# Altium PCB amt203s_connector.PCBDOC
Units mm, origin at the board's own origin, x right, y up, seen from the top; angles counter-clockwise.
Board outline 14.99 x 14.99 mm, 2 copper layers (TopLayer, BottomLayer); 4 components, 9 nets, 23 pads, 0 vias.
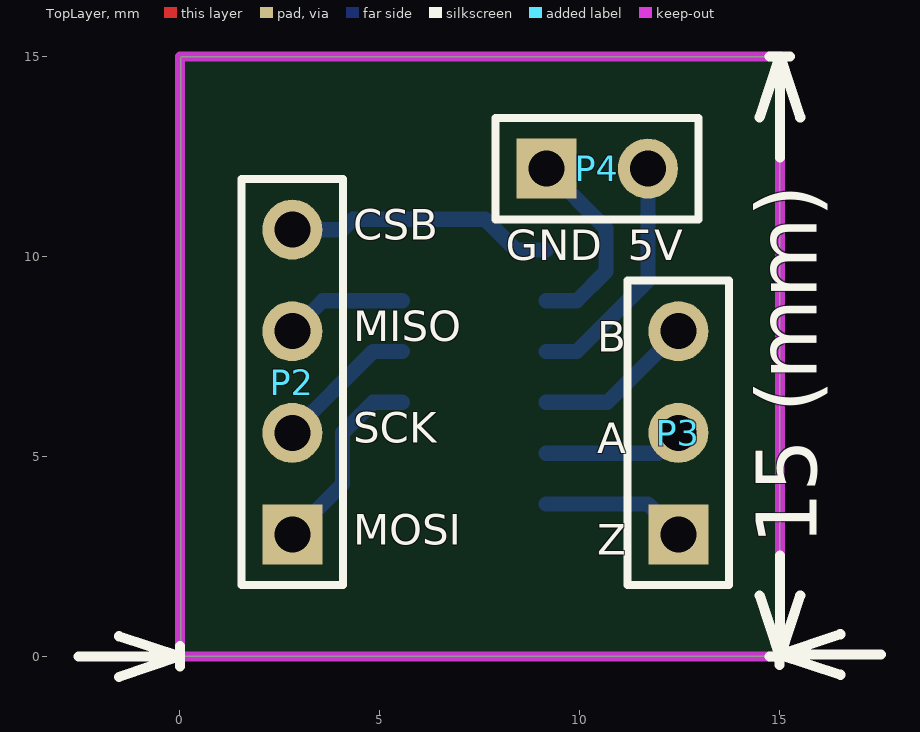
[diagram p0: TopLayer view]
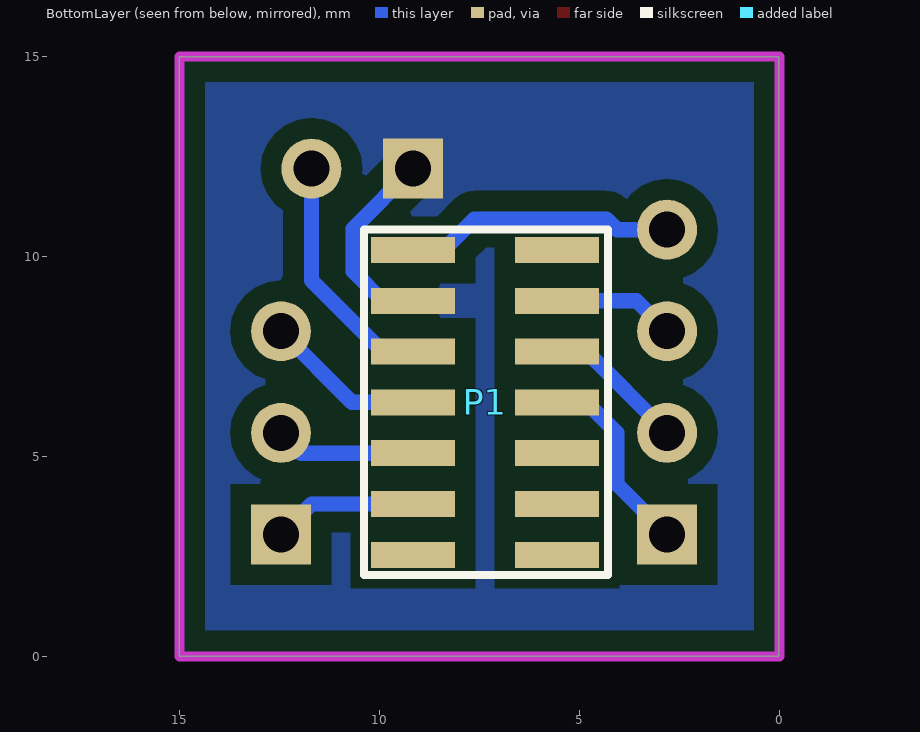
[diagram p1: BottomLayer view, seen from below]

## Layer stack, top to bottom
TopSolder: solder mask 0.0102, Solder Resist, Dk 3.5
TopLayer: signal copper 0.0356
Dielectric1: core 0.32, FR-4, Dk 4.8
BottomLayer: signal copper 0.0356
BottomSolder: solder mask 0.0102, Solder Resist, Dk 3.5

## Board outline
0.014,0 15,0 15,14.986 0.014,14.986

## Design rules (kind name [scope] priority, off if disabled: settings)
Clearance [All] p1: gap=0.508 ignorepadtopadclearanceinfootprint=FALSE except(0: Arc-Text Arc-Hole Track-Text Track-Hole SMDPad-Text SMDPad-Hole THPad-Text THPad-Hole Via-Text Via-Hole Fill-Text Fill-Hole Poly-Text Poly-Hole Region-Text Region-Hole Text-Text Text-Hole; 0.254: Arc-Arc Arc-Track Arc-SMDPad Arc-THPad Arc-Via Track-Track Track-SMDPad Track-THPad Track-Via SMDPad-SMDPad SMDPad-THPad SMDPad-Via THPad-THPad THPad-Via Via-Via)
ComponentClearance [All] p1: gap=0 collisioncheckmode=3 verticalgap=0.254 showdistances=FALSE
FabricationTestPointUsage TestPointUsage [All] p1: valid=0 allowmultiple=FALSE
FabricationTestpoint Testpoint [All] p1: side=3 testpointundercomponent=TRUE minsize=1.016 maxsize=2.54 preferedsize=1.524 minholesize=0.508 maxholesize=1.016 preferedholesize=0.813 testpointgrid=0.025 allowsidetop=TRUE allowsidebottom=TRUE usegrid=TRUE gridtolerance=0
PasteMaskExpansion PasteMaskExpansion_1 [InComponent('P1')] p1: expansion=-3.81
PasteMaskExpansion [All] p2: expansion=0
PlaneClearance [All] p1: clearance=0.254
PlaneConnect [All] p1: planeconnectstyle=Direct reliefexpansion=0.508 reliefentries=4 reliefconductorwidth=0.254 reliefairgap=0.254
PolygonConnect [All] p1: connectstyle=Direct reliefconductorwidth=0.254 reliefentries=4 polygonreliefangle="90 Angle" airgapwidth=0.254
RoutingVias [All] p1: holewidth=0.711 width=1.27 viastyle="Through Hole" minholewidth=0.711 minwidth=1.27 maxholewidth=0.711 maxwidth=1.27
SilkToSolderMaskClearance SilkscreenOverComponentPads [IsPad] p1: minsilkscreentomaskgap=0.254 clearancetoexposedcopper=TRUE
SolderMaskExpansion [All] p1: expansion=0.051
Width [All] p1: maxlimit=1.27 minlimit=0.254 preferedwidth=0.381
23 further rules are at their usual default settings.

## Components (designator, comment, footprint, x,y, rotation, side; value= is the part's Value field where it differs from the comment)
P1 "AMT203S connector" HDR2X7_1.27mm-AMT203_connector 5.558,2.54 r90 bottom
P2 "Absolute" HDR1X4 2.808,3.048 r90 top
P3 "Incremental" HDR1X3 12.46,3.048 r90 top
P4 "Power supply" HDR1X2 9.158,12.192 r0 top

## Footprints (in the part's own frame and the unit in brackets; to place one, negate y for a bottom-side part, rotate by r counter-clockwise, add the part's x,y. Pads: shape width x height; smd on the part's side, far side on the other; paste and mask are expansions set on the pad)
HDR1X2 [mm] "Connector; Header; 2 Position"
  rect 1.5x1.5 hole 0.9: 1(0,0)
  round 1.5 hole 0.9: 2(2.54,0)
  silkscreen extent -1.27,-1.27 3.81,1.27
HDR1X3 [mm] "Connector; Header; 3 Position"
  rect 1.5x1.5 hole 0.9: 1(0,0)
  round 1.5 hole 0.9: 2(2.54,0) 3(5.08,0)
  silkscreen extent -1.27,-1.27 6.35,1.27
HDR1X4 [mm] "Connector; Header; 4 Position"
  rect 1.5x1.5 hole 0.9: 1(0,0)
  round 1.5 hole 0.9: 2(2.54,0) 3(5.08,0) 4(7.62,0)
  silkscreen extent -1.27,-1.27 8.89,1.27
HDR2X7_1.27mm-AMT203_connector [mm] "Connector; Header; 7x2 Position"
  rect 0.65x2.1 smd: 1(7.62,3.6) 2(7.62,0) 3(6.35,3.6) 4(6.35,0) 5(5.08,3.6) 6(5.08,0) 7(3.81,3.6) 8(3.81,0) 9(2.54,3.6) 10(2.54,0) 11(1.27,3.6) 12(1.27,0) 13(0,3.6) 14(0,0)
  silkscreen extent -0.51,-1.27 8.13,4.83, body extent -0.83,-0.52 8.46,4.08, height 4.5

## Part data
P1: library part "Header 7X2", "Header, 7-Pin, Dual row", LatestRevisionDate=17-Jul-2002, LatestRevisionNote="Re-released for DXP Platform.", Publisher="Altium Limited"
P2: library part "Header 4", "Header, 4-Pin", LatestRevisionDate=17-Jul-2002, LatestRevisionNote="Re-released for DXP Platform.", Publisher="Altium Limited"
P3: library part "Header 3", "Header, 3-Pin", LatestRevisionDate=17-Jul-2002, LatestRevisionNote="Re-released for DXP Platform.", Publisher="Altium Limited"
P4: library part "Header 2", "Header, 2-Pin", LatestRevisionDate=17-Jul-2002, LatestRevisionNote="Re-released for DXP Platform.", Publisher="Altium Limited"

## Nets (pads, with @x,y where several pads share a name; then routed paths per layer and width w, separated by ;. In a path a pad name is that pad's centre, name@x,y a point inside that pad or via, vN(x,y) a via of type N, cw(c..) or ccw(c..) an arc to the next point about the centre after c; other vN are vias at no path point)
5V: P1.5 P4.2 | length 6.1
  BottomLayer w0.381: P1.5 9.92,7.62 11.698,9.398 P4.2
A: P1.9 P3.2 | length 3.5
  BottomLayer w0.381: P1.9 11.952,5.08 P3.2
B: P1.7 P3.3 | length 4
  BottomLayer w0.381: P1.7 10.682,6.35 P3.3
CSB: P1.1 P2.4 | length 6.8
  BottomLayer w0.381: P2.4 4.062,10.668 4.324,10.93 7.626,10.93 8.396,10.16 P1.1
GND: P1.3 P4.1 | length 5
  BottomLayer w0.381: P1.3 9.92,8.89 10.653,9.623 10.653,10.697 P4.1
MISO: P1.4 P2.3 | length 3.1
  BottomLayer w0.381: P2.3 3.57,8.89 P1.4
MOSI: P1.8 P2.1 | length 4.9
  BottomLayer w0.381: P2.1 4.063,4.303 4.063,5.589 4.824,6.35 P1.8
SCK: P1.6 P2.2 | length 3.6
  BottomLayer w0.381: P2.2 2.808,5.604 4.824,7.62 P1.6
Z: P1.11 P3.1 | length 3.6
  BottomLayer w0.381: P1.11 11.698,3.81 P3.1
pads on no net: P1.2 P1.10 P1.12 P1.13 P1.14

## Polygon pours and split planes (outlines as drawn)
GND on BottomLayer "GND_L02_P014" (solid, remove dead copper, pour order 14): 0.014,14.986 15,14.986 15,0 0.014,0

## Keep-outs
KeepOutLayer:
  lines w0.254: 0,0 0,15 15,15 15,0 0,0

## Other copper
BottomLayer:
  region: 9.71,11.684

## Silkscreen, mask and mechanical layers (free items; w line width, h text height)
TopOverlay:
  lines w0.254: -2.54,-0.007 0,0 ; -1.525,0.504 0,0 ; -1.523,-0.512 0,0 ; -0.001,0.254 0.001,-0.254 ; 14.492,1.524 15,0 ; 14.492,13.476 15,15 ; 14.746,0 15.254,0 ; 14.746,15 15.254,15 ; 14.985,0.296 14.987,-0.212 ; 15,2.523 15,0 ; 15,12.477 15,15 ; 15.508,1.524 15,0 ; 15.508,13.476 15,15 ; 16.509,0.554 14.986,0.042 ; 16.511,-0.462 14.986,0.042 ; 17.526,0.049 14.986,0.042
  text "CSB" at 4.332,10.414 h0.76
  text "GND" at 8.142,9.906 h0.76
  text "5V" at 11.19,9.906 h0.76
  text "MISO" at 4.332,7.874 h0.76
  text "B" at 10.428,7.62 h0.76
  text "SCK" at 4.332,5.334 h0.76
  text "A" at 10.428,5.08 h0.76
  text "MOSI" at 4.332,2.794 h0.76
  text "15 (mm)" at 15.914,2.777 h1.52 r90
  text "Z" at 10.428,2.54 h0.76
  text "14.986 (mm)" at -0.14,-3.657 h1.52 r0.16